# Altium PCB PCB1.PcbDoc
Units mil, origin at the board's own origin, x right, y up, seen from the top; angles counter-clockwise.
Board outline 2932 x 1521 mil, 2 copper layers (Top Layer, Bottom Layer), stack 60.4 mil thick; 49 components, 31 nets, 178 pads, 59 vias.
Unrouted connection lines stored in the file: 1.
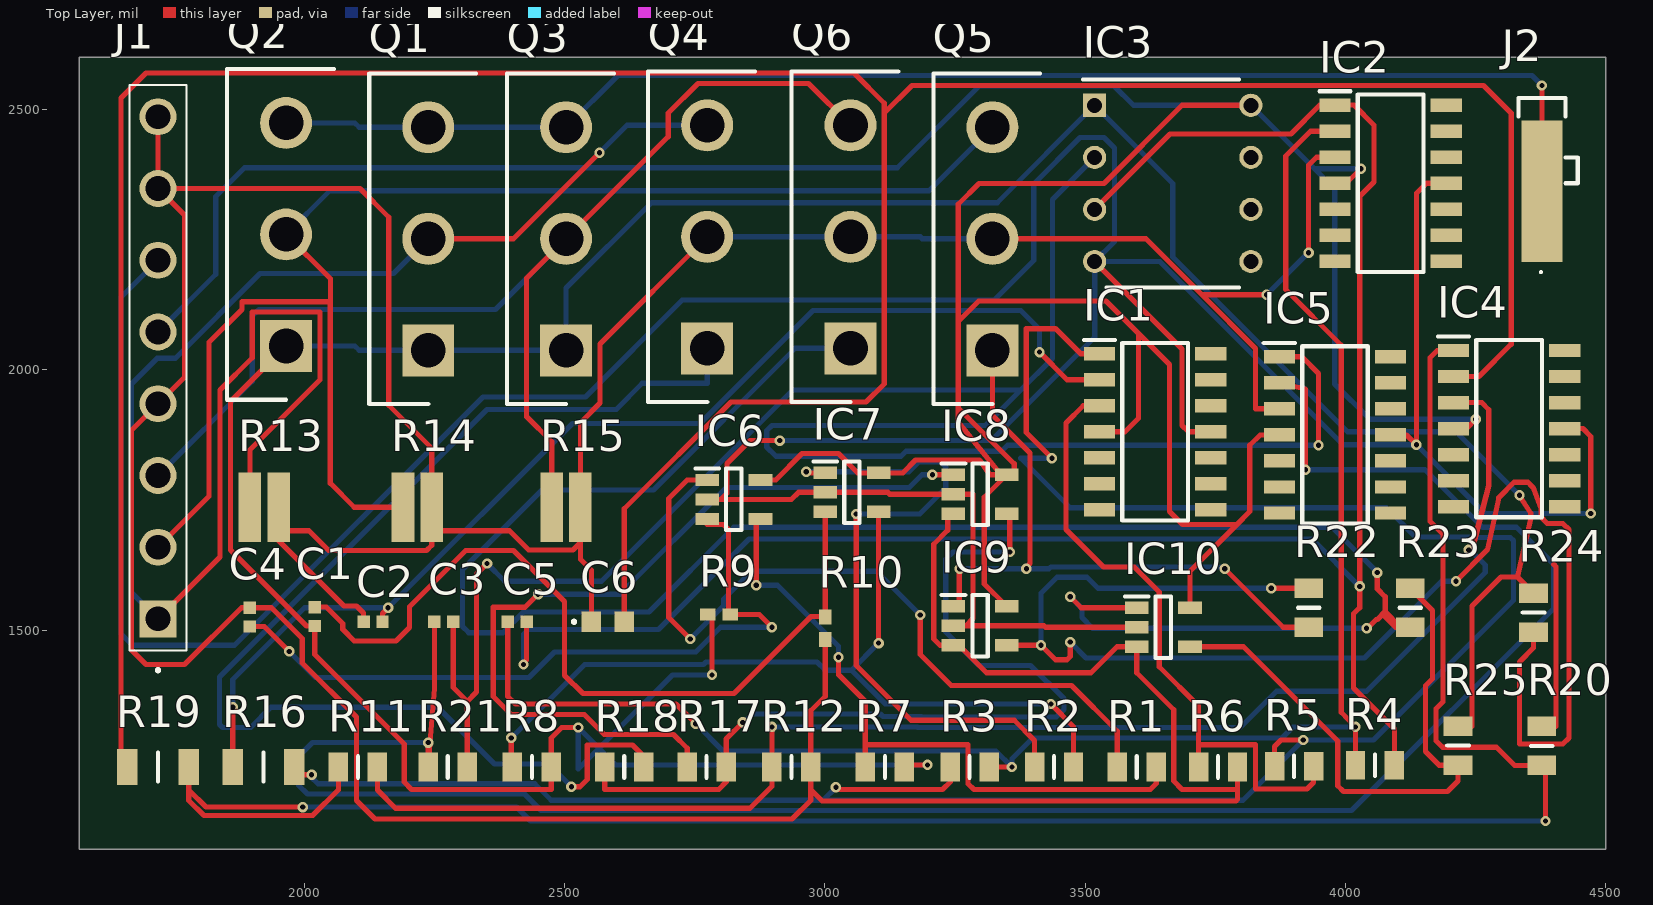
[diagram p0: Top Layer view]
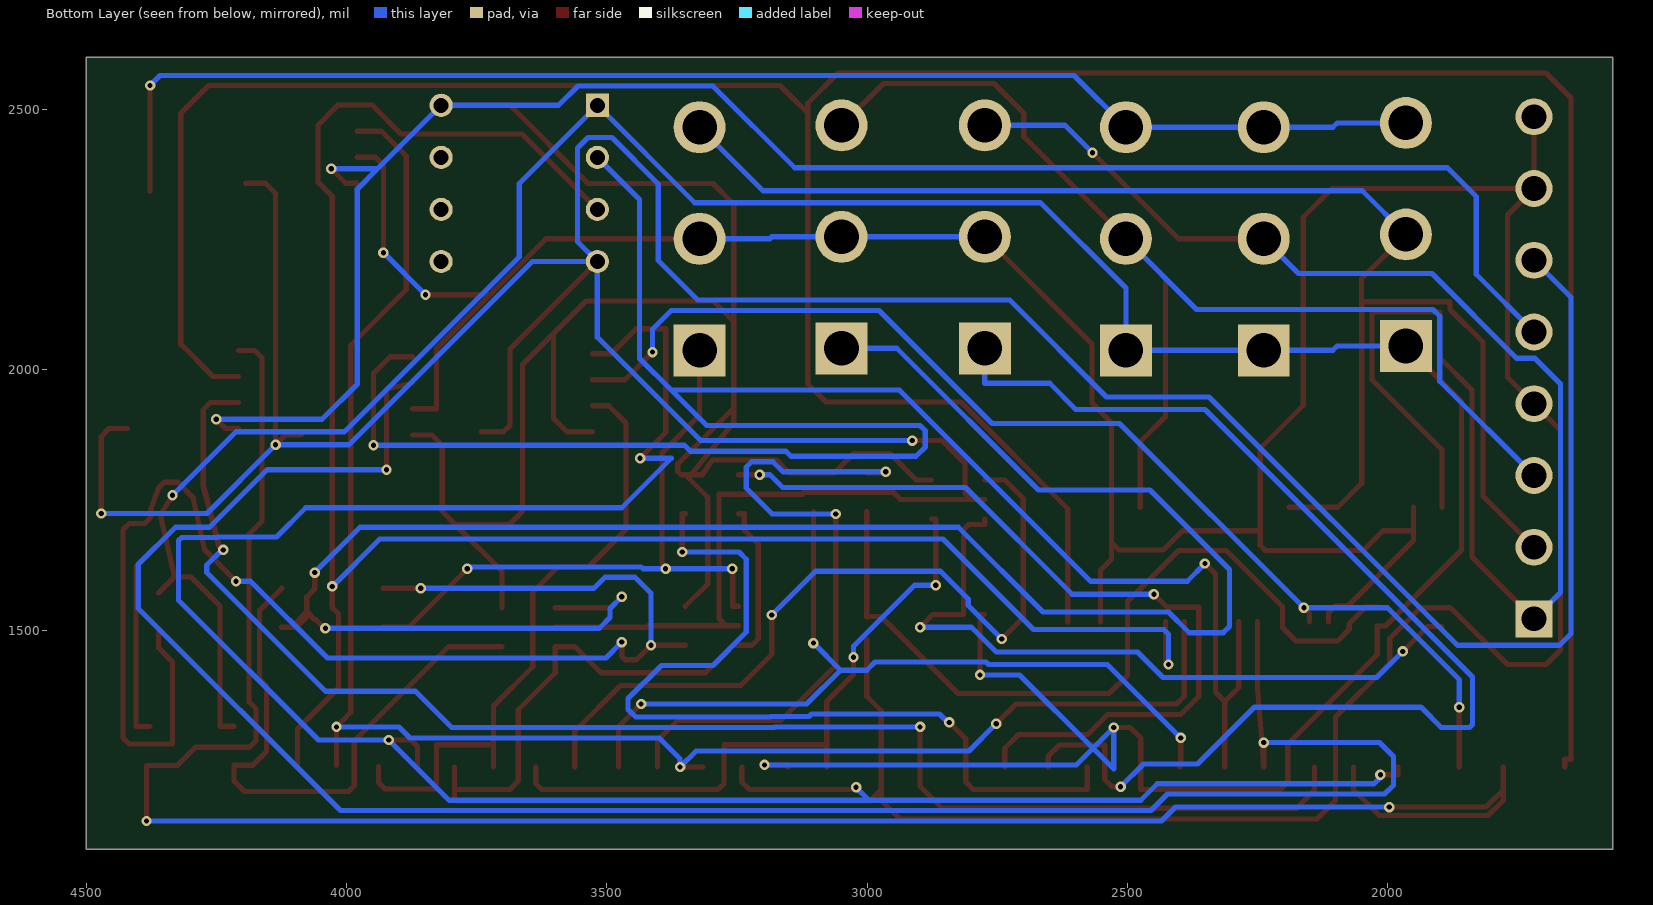
[diagram p1: Bottom Layer view, seen from below]
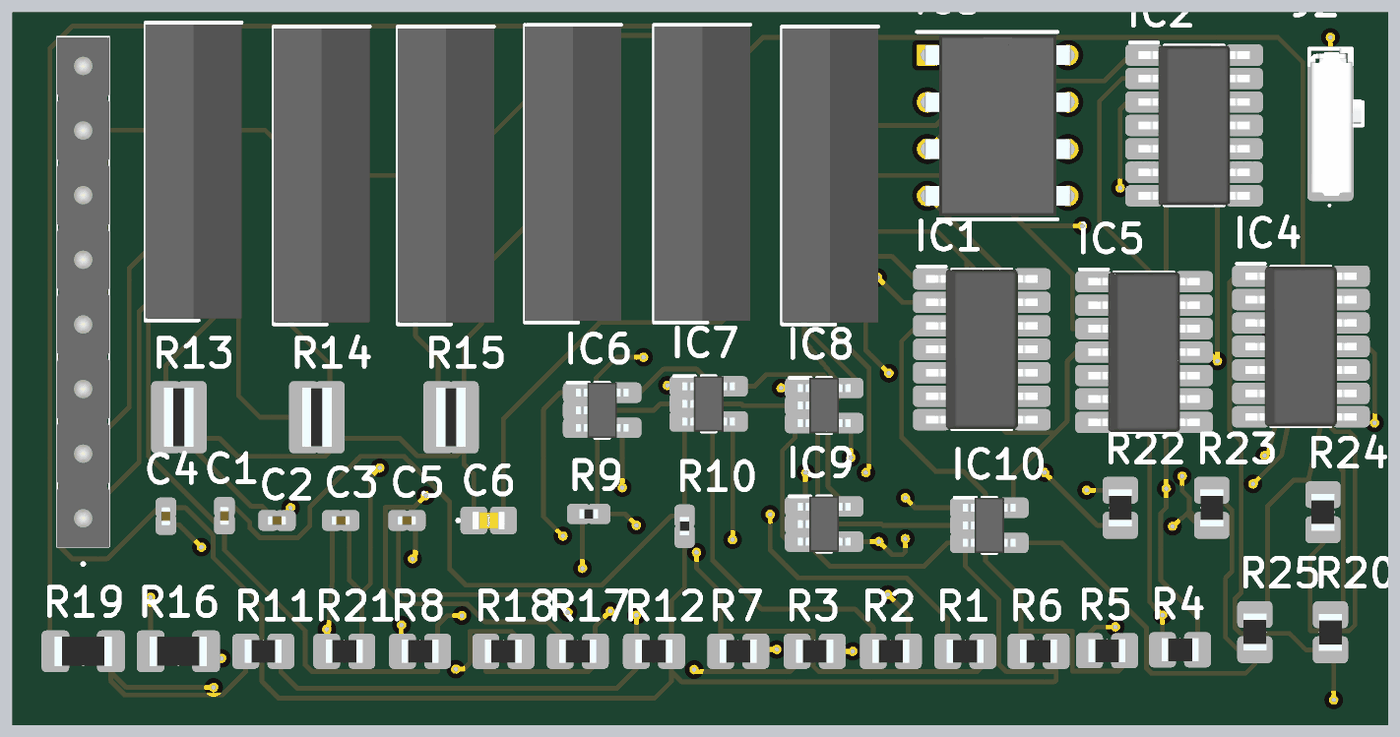
[diagram p2: 3D render of the assembled board from above, using the file's embedded part models]

## Layer stack, top to bottom
Top Solder: solder mask 0.5, Solder Resist, Dk 3.3
Top Layer: signal copper 0.7
Dielectric1: core 59, FR-4, Dk 4.3
Bottom Layer: signal copper 0.7
Bottom Solder: solder mask 0.5, Solder Resist, Dk 3.3

## Board outline
1568,1079 4500,1079 4500,2600 1568,2600

## Design rules (kind name [scope] priority, off if disabled: settings)
Clearance [All] p1: gap=10 ignorepadtopadclearanceinfootprint=FALSE
DiffPairsRouting [All] p1: maxlimit=10 minlimit=10 mostfreqgap=10 toplayer_minwidth=10 toplayer_maxwidth=10 toplayer_prefwidth=10 bottomlayer_minwidth=10 bottomlayer_maxwidth=10 bottomlayer_prefwidth=10 maxuncoupledlength=500
HoleSize [All] p1: absolutevalues=TRUE maxlimit=300 minlimit=10 maxpercent=80.000 minpercent=20.000
MinimumAnnularRing [All] p1: minimumring=10
PasteMaskExpansion [All] p1: expansion=10
PlaneClearance [All] p1: clearance=15
PlaneConnect [All] p1: pad.planeconnectstyle=Relief pad.reliefexpansion=20 pad.reliefentries=4 pad.reliefconductorwidth=10 pad.reliefairgap=10 via.planeconnectstyle=Direct via.reliefexpansion=20 via.reliefentries=4 via.reliefconductorwidth=10 via.reliefairgap=10
PolygonConnect [All] p1: thpad.connectstyle=Relief thpad.reliefconductorwidth=10 thpad.reliefentries=4 thpad.polygonreliefangle="90 Angle" thpad.airgapwidth=10 smdpad.connectstyle=Relief smdpad.reliefconductorwidth=10 smdpad.reliefentries=4 smdpad.polygonreliefangle="90 Angle" smdpad.airgapwidth=10 via.connectstyle=Direct via.reliefconductorwidth=10 via.reliefentries=4 via.polygonreliefangle="90 Angle" via.airgapwidth=10
RoutingVias [All] p1: holewidth=10 width=20 viastyle="Through Hole" minholewidth=10 minwidth=20 maxholewidth=10 maxwidth=20
SMDNeckDown [All] p1: percent=100.000
SilkToSolderMaskClearance SilkscreenOverComponentPads [IsPad] p1: minsilkscreentomaskgap=10 clearancetoexposedcopper=TRUE
SolderMaskExpansion [All] p1: expansion=10 istentingtop=FALSE
Width [All] p1: maxlimit=10 minlimit=10 preferedwidth=10
24 further rules are at their usual default settings.

## Components (designator, comment, footprint, x,y, rotation, side; value= is the part's Value field where it differs from the comment)
C1 "1uF" CAPC1005X55N 2020,1526 r90 top
C2 "0.1uF" CAPC1005X55N 2132.01,1516.02 r0 top
C3 "0.1uF" CAPC1005X55N 2267.88,1516.02 r0 top
C4 "1uF" CAPC1005X55N 1895.42,1525 r90 top
C5 "1uF" CAPC1005X55N 2408.87,1516.02 r0 top
C6 "0.01uF" C0603 2582.99,1516.02 r0 top
IC1 "LM324AD" SOIC127P600X175-14N 3634,1880.99 r0 top
IC2 "LM324AD" SOIC127P600X175-14N 4086.43,2358.35 r0 top
IC3 "LM393N" DIP762W53P254L980H533Q8N 3668,2358 r0 top
IC4 "LM324AD" SOIC127P600X175-14N 4314,1887 r0 top
IC5 "LM324AD" SOIC127P600X175-14N 3979.65,1874.99 r0 top
IC6 "TLV271CW5-7" SOT95P285X130-5N 2825,1751 r0 top
IC7 "TLV271CW5-7" SOT95P285X130-5N 3051.82,1764.6 r0 top
IC8 "TLV271CW5-7" SOT95P285X130-5N 3298,1761 r0 top
IC9 "TLV271CW5-7" SOT95P285X130-5N 3297.98,1508.28 r0 top
IC10 "TLV271CW5-7" SOT95P285X130-5N 3649.97,1505.6 r0 top
J1 "1945151" 1945151 1719,1521.43 r90 top
J2 "2065-100_998-403" 2065100998403 4388.81,2353.83 r90 top
Q1 "S1" TO544P521X1592X2557-3P 2238,2037.48 r90 top
Q2 "S3" TO544P521X1592X2557-3P 1965,2045.83 r90 top
Q3 "S5" TO544P521X1592X2557-3P 2502.87,2037.48 r90 top
Q4 "S2" TO544P521X1592X2557-3P 2773.82,2041.22 r90 top
Q5 "S4" TO544P521X1592X2557-3P 3321.6,2037.48 r90 top
Q6 "S6" TO544P521X1592X2557-3P 3049.04,2041.22 r90 top
R1 "10k" RESC2012X60N 3598.79,1237 r0 top
R2 "10k" RESC2012X60N 3440,1237 r0 top
R3 "10k" RESC2012X60N 3277.9,1237 r0 top
R4 "100k" RESC2012X60N 4056.43,1240.2 r0 top
R5 "10k" RESC2012X60N 3901,1238.23 r0 top
R6 "10k" RESC2012X60N 3755,1237 r0 top
R7 "10k" RESC2012X60N 3114.98,1237 r0 top
R8 "10k" RESC2012X60N 2436.93,1237 r0 top
R9 "5.6k" RESC1005X40N 2796.46,1529.94 r0 top
R10 "5.6k" RESC1005X40N 3000.64,1503.63 r90 top
R11 "10k" RESC2012X60N 2102.87,1237 r0 top
R12 "10k" RESC2012X60N 2935.4,1237 r0 top
R13 "300" RESC1632X65N 1922.98,1736 r0 top
R14 "300" RESC1632X65N 2217.05,1736 r0 top
R15 "300" RESC1632X65N 2502.81,1736 r0 top
R16 "90k" RESC3116X65N 1921.65,1237 r0 top
R17 "10k" RESC2012X60N 2772.83,1237 r0 top
R18 "10k" RESC2012X60N 2614.49,1237 r0 top
R19 "90k" RESC3116X65N 1719,1237 r0 top
R20 "10k" RESC2012X60N 4377,1277.6 r90 top
R21 "10k" RESC2012X60N 2275.4,1237 r0 top
R22 "10k" RESC2012X60N 3929.14,1543 r90 top
R23 "10k" RESC2012X60N 4124,1543 r90 top
R24 "10k" RESC2012X60N 4361,1533.6 r90 top
R25 "10k" RESC2012X60N 4216,1278 r90 top

## Footprints (in the part's own frame and the unit in brackets; to place one, negate y for a bottom-side part, rotate by r counter-clockwise, add the part's x,y. Pads: shape width x height; smd on the part's side, far side on the other; paste and mask are expansions set on the pad)
1945151 [mm]
  rect 1.8x1.8 hole 1.2: 1(0,0)
  round 1.8 hole 1.2: 2(3.5,0) 3(7,0) 4(10.5,0) 5(14,0) 6(17.5,0) 7(21,0) 8(24.5,0)
  silkscreen extent -2.55,-1.4 26.05,1.4, body extent -1.57,-1.4 26.03,1.4, height 9.38
2065100998403 [mm]
  rect 6.9x2 smd: 1(-0.275,0.3)
  silkscreen extent -4.27,-1.45 4.27,1.45, body extent -3.71,-1.37 4.29,1.38, height 2.7
C0603 [mm]
  rect 0.95x1 smd: 1(-0.8,0) 2(0.8,0)
  silkscreen extent -1.7,-0.05 -1.6,0.05, body extent -0.87,-0.48 0.88,0.47, height 0.87
CAPC1005X55N [mm]
  rect 0.6x0.62 smd: 1(-0.46,0) 2(0.46,0)
  body extent -0.5,-0.25 0.5,0.25, height 0.55
DIP762W53P254L980H533Q8N [mm]
  rect 1.13x1.13 hole 0.73: 1(-3.81,3.81)
  round 1.13 hole 0.73: 2(-3.81,1.27) 3(-3.81,-1.27) 4(-3.81,-3.81) 5(3.81,-3.81) 6(3.81,-1.27) 7(3.81,1.27) 8(3.81,3.81)
  silkscreen extent -4.38,-5.07 3.24,5.08, body extent -3.94,-4.9 3.94,4.9, height 5.33
RESC1005X40N [mm]
  rect 0.75x0.6 smd: 1(-0.55,0) 2(0.55,0)
  body extent -0.5,-0.25 0.5,0.25, height 0.4
RESC1632X65N [mm]
  rect 1.1x3.4 smd: 1(-0.7,0) 2(0.7,0)
  body extent -0.8,-1.6 0.8,1.6, height 0.65
RESC2012X60N [mm]
  rect 0.95x1.4 smd: 1(-0.95,0) 2(0.95,0)
  silkscreen extent 0,-0.52 0,0.53, body extent -1,-0.63 1,0.63, height 0.6
RESC3116X65N [mm]
  rect 1x1.75 smd: 1(-1.5,0) 2(1.5,0)
  silkscreen extent 0,-0.7 0,0.7, body extent -1.55,-0.8 1.55,0.8, height 0.65
SOIC127P600X175-14N [mm]
  rect 1.525x0.65 smd: 1(-2.712,3.81) 2(-2.712,2.54) 3(-2.712,1.27) 4(-2.712,0) 5(-2.712,-1.27) 6(-2.712,-2.54) 7(-2.712,-3.81) 8(2.712,-3.81) 9(2.712,-2.54) 10(2.712,-1.27) 11(2.712,0) 12(2.712,1.27) 13(2.712,2.54) 14(2.712,3.81)
  silkscreen extent -3.47,-4.33 1.6,4.49, body extent -3.01,-4.33 3.01,4.33, height 1.75
SOT95P285X130-5N [mm]
  rect 1.15x0.6 smd: 1(-1.3,0.95) 2(-1.3,0) 3(-1.3,-0.95) 4(1.3,-0.95) 5(1.3,0.95)
  silkscreen extent -1.87,-1.5 0.37,1.5, body extent -1.43,-1.5 1.43,1.5, height 1.3
TO544P521X1592X2557-3P [mm]
  rect 2.535x2.535 hole 1.69: 1(0,0)
  round 2.535 hole 1.69: 2(5.44,0) 3(10.88,0)
  silkscreen extent -2.63,-2.33 13.5,2.88, body extent -2.52,-2.33 13.4,2.88, height 25.23

## Part data
C1 C4 C5: library part JMK105BJ105KV-F, "Capacitor", Manufacturer_Name="TAIYO YUDEN", Mouser Part Number=963-JMK105BJ105KV-F, Datasheet Link=https://datasheet.datasheetarchive.com/originals/distributors/Datasheets-DGA20/25674.pdf, Height=0.55mm, Manufacturer_Part_Number=JMK105BJ105KV-F, Mouser Price/Stock=https://www.mouser.co.uk/ProductDetail/TAIYO-YUDEN/JMK105BJ105KV-F?qs=I6KAKw0tg2yJ6Hx%2Fbib9CA%3D%3D
C2 C3: library part CL05B104KP5NNNC, "Capacitor", Manufacturer_Name=SAMSUNG, Mouser Part Number=187-CL05B104KP5NNNC, Arrow Part Number=CL05B104KP5NNNC, Arrow Price/Stock=https://www.arrow.com/en/products/cl05b104kp5nnnc/samsung-electro-mechanics?region=nac, Datasheet Link=http://product.samsungsem.com/mlcc/CL05B104KP5NNN.do, Height=0.55mm, Manufacturer_Part_Number=CL05B104KP5NNNC, Mouser Price/Stock=https://www.mouser.co.uk/ProductDetail/Samsung-Electro-Mechanics/CL05B104KP5NNNC?qs=349EhDEZ59qDkVTTBSSSxw%3D%3D
C6: library part C0603C103J5REC7411, "Capacitor", Manufacturer_Name=KEMET, Mouser Part Number=80-C0603C103J5RE7411, Arrow Part Number=C0603C103J5REC7411, Arrow Price/Stock=https://www.arrow.com/en/products/c0603c103j5rec7411/kemet-corporation?region=nac, Datasheet Link=https://content.kemet.com/datasheets/KEM_C1090_X7R_ESD.pdf, Height=0.87mm, Manufacturer_Part_Number=C0603C103J5REC7411, Mouser Price/Stock=https://www.mouser.co.uk/ProductDetail/KEMET/C0603C103J5REC7411?qs=Mv7BduZupUg87Ut%2FUQ7ZXg%3D%3D
IC1 IC2 IC4 IC5: "Integrated Circuit", Manufacturer_Name="Texas Instruments", Mouser Part Number=595-LM324AD, Arrow Part Number=LM324AD, Arrow Price/Stock=https://www.arrow.com/en/products/lm324ad/texas-instruments?region=nac, Datasheet Link=http://www.ti.com/lit/ds/symlink/lm324a.pdf, Height=1.75mm, Manufacturer_Part_Number=LM324AD, Mouser Price/Stock=https://www.mouser.co.uk/ProductDetail/Texas-Instruments/LM324AD?qs=KaAwwOlwapt3jpyTZJatfQ%3D%3D
IC3: "Integrated Circuit", Manufacturer_Name=onsemi, Mouser Part Number=512-LM393N, Arrow Part Number=LM393N, Arrow Price/Stock=https://www.arrow.com/en/products/lm393n/on-semiconductor, Datasheet Link=http://www.onsemi.com/pub/Collateral/LM293A-D.pdf, Height=5.33mm, Manufacturer_Part_Number=LM393N, Mouser Price/Stock=https://www.mouser.co.uk/ProductDetail/onsemi-Fairchild/LM393N?qs=nkpohTZxueNdqcpnqJ9y4g%3D%3D
IC6 IC7 IC8 IC9 IC10: "Integrated Circuit", Manufacturer_Name="Diodes Incorporated", Mouser Part Number=621-TLV271CW5-7, Arrow Part Number=TLV271CW5-7, Arrow Price/Stock=https://www.arrow.com/en/products/tlv271cw5-7/diodes-incorporated?region=nac, Datasheet Link=https://datasheet.datasheetarchive.com/originals/distributors/Datasheets-DGA25/1624112.pdf, Height=1.3mm, Manufacturer_Part_Number=TLV271CW5-7, Mouser Price/Stock=https://www.mouser.co.uk/ProductDetail/Diodes-Incorporated/TLV271CW5-7?qs=dOK1vf2izjvah6baIk3yaA%3D%3D
J1: "Connector", Manufacturer_Name="Phoenix Contact", Mouser Part Number=651-1945151, Arrow Part Number=1945151, Arrow Price/Stock=https://www.arrow.com/en/products/1945151/phoenix-contact?region=nac, Datasheet Link=http://www.phoenixcontact.com/de/produkte/1945151/pdf, Height=9.2mm, Manufacturer_Part_Number=1945151, Mouser Price/Stock=https://www.mouser.co.uk/ProductDetail/Phoenix-Contact/1945151?qs=BYlwlsDsB%2FoyXM%2FBwWKgUA%3D%3D
J2: "Connector", Arrow Part Number=2065-100/998-403, Manufacturer_Name=Wago, Arrow Price/Stock=null?region=nac, Datasheet Link=https://www.wago.com/2065-100/998-403, Height=2.7mm, Manufacturer_Part_Number=2065-100/998-403
Q1 Q2 Q3 Q4 Q5 Q6: library part IHW30N160R5XKSA1, "Transistor IGBT", Manufacturer_Name=Infineon, Mouser Part Number=726-IHW30N160R5XKSA1, Arrow Part Number=IHW30N160R5XKSA1, Arrow Price/Stock=https://www.arrow.com/en/products/ihw30n160r5xksa1/infineon-technologies-ag?region=nac, Datasheet Link=https://www.infineon.com/dgdl/Infineon-IHW30N160R5-DS-v02_01-EN.pdf?fileId=5546d462677d0f460167ac8d680e1923, Height=5.21mm, Manufacturer_Part_Number=IHW30N160R5XKSA1, Mouser Price/Stock=https://www.mouser.co.uk/ProductDetail/Infineon-Technologies/IHW30N160R5XKSA1?qs=l7cgNqFNU1iDDdZRXMbfcQ%3D%3D
R1 R2 R3 R5 R6 R7 R8 R11 R12 R17 R18 R20 R21 R22 R23 R24 R25: library part RC0805FR-0710KL, "Resistor", Manufacturer_Name=YAGEO, Mouser Part Number=603-RC0805FR-0710KL, Arrow Part Number=RC0805FR-0710KL, Arrow Price/Stock=https://www.arrow.com/en/products/rc0805fr-0710kl/yageo?region=nac, Datasheet Link=https://www.yageo.com/upload/media/product/productsearch/datasheet/rchip/PYu-RC_Group_51_RoHS_L_11.pdf, Height=0.6mm, Manufacturer_Part_Number=RC0805FR-0710KL, Mouser Price/Stock=https://www.mouser.co.uk/ProductDetail/YAGEO/RC0805FR-0710KL?qs=7bY8808IzHq6vrU3BeiiYw%3D%3D
R4: library part RC0805FR-07100KL, "Resistor", Manufacturer_Name=KEMET, Mouser Part Number=603-RC0805FR-07100KL, Arrow Part Number=RC0805FR-07100KL, Arrow Price/Stock=https://www.arrow.com/en/products/rc0805fr-07100kl/yageo?region=nac, Datasheet Link=http://www.yageo.com/documents/recent/PYu-RC_Group_51_RoHS_L_10.pdf, Height=0.6mm, Manufacturer_Part_Number=RC0805FR-07100KL, Mouser Price/Stock=https://www.mouser.co.uk/ProductDetail/YAGEO/RC0805FR-07100KL?qs=8Y8p%252BasKcI7rEWn6FcVdAA%3D%3D
R9 R10: library part RC0402FR-075K6L, "Resistor", Manufacturer_Name=KEMET, Mouser Part Number=603-RC0402FR-075K6L, Arrow Part Number=RC0402FR-075K6L, Arrow Price/Stock=https://www.arrow.com/en/products/rc0402fr-075k6l/yageo?region=nac, Datasheet Link=http://www.yageo.com/documents/recent/PYu-RC0402_51_RoHS_L_6_r.pdf, Height=0.4mm, Manufacturer_Part_Number=RC0402FR-075K6L, Mouser Price/Stock=https://www.mouser.co.uk/ProductDetail/YAGEO/RC0402FR-075K6L?qs=Is6ZsIPfHkZGbvQHE6fDOQ%3D%3D
R13 R14 R15: library part LTR18EZPJ301, "Resistor", Manufacturer_Name="ROHM Semiconductor", Mouser Part Number=755-LTR18EZPJ301, Datasheet Link=https://componentsearchengine.com/Datasheets/1/LTR18EZPJ301.pdf, Height=0.65mm, Manufacturer_Part_Number=LTR18EZPJ301, Mouser Price/Stock=https://www.mouser.co.uk/ProductDetail/ROHM-Semiconductor/LTR18EZPJ301?qs=DyUWGjl%252BcVuuqATaEQmgHQ%3D%3D
R16 R19: library part RT1206DRE0790KL, "Resistor", Manufacturer_Name=KEMET, Mouser Part Number=603-RT1206DRE0790KL, Datasheet Link=https://www.yageo.com/en/ProductSearch/PartNumberSearch?part_number=RT1206DRE0790KL, Height=0.65mm, Manufacturer_Part_Number=RT1206DRE0790KL, Mouser Price/Stock=https://www.mouser.co.uk/ProductDetail/Yageo/RT1206DRE0790KL?qs=NgbZBzc1CyEoLHe57MF17w%3D%3D

## Via types
v1: diameter 20, hole 10, Top Layer to Bottom Layer, 59 vias

## Nets (pads, with @x,y where several pads share a name; then routed paths per layer and width w, separated by ;. In a path a pad name is that pad's centre, name@x,y a point inside that pad or via, vN(x,y) a via of type N, cw(c..) or ccw(c..) an arc to the next point about the centre after c; other vN are vias at no path point)
1: C1.1 IC3.1 Q1.1 Q2.1 Q3.1 R7.2 R8.2 R9.1 R24.2 R25.2 | length 6370.9
  Top Layer w10: Q2.1 1858,1938.83 1858,1654 2004.11,1507.89 C1.1 2020,1453 2192,1281 2192,1208 2206,1194 2474.33,1194 R8.2 2474.33,1293 2494.33,1313 v1(2526,1313) ; R9.1 2783,1529.94 v1(2783,1414) ; R7.2 3152.39,1241 v1(3197,1241) ; R25.2 4243,1315.4 4243,1546.54 4298.45,1601.99 4330,1601.99 ; v1(4334,1759) 4354.21,1726.96 4355.75,1724.52 4355.75,1715.72 4330,1601.99 ; R24.2 4330,1601.99
  Bottom Layer w10: Q2.1 2097,2045.83 2105.35,2037.48 Q1.1 Q3.1 2502.87,2156.87 2667,2321 3331,2321 IC3.1 3668,2358 3668,2216.6 4003.6,1881 4212,1881 v1(4334,1759) ; v1(2783,1414) 2707,1414 2566,1273 ; v1(3197,1241) 2598,1241 2566,1273 ; 2566,1273 2526,1233 v1(2526,1313) 2566,1273
2: Q4.1 R18.2 | length 2327.9
  Top Layer w10: v1(2513,1199) 2529.38,1199 2543.38,1213 2543.38,1279.56 2630.33,1279.56 2651.89,1258 R18.2
  Bottom Layer w10: v1(2513,1199) 2469,1243 2365,1243 2256,1352 1936,1352 1897,1313 1843,1313 1837,1319 1837,1410 2351,1924 2599,1924 2649,1974 2773.82,1974 Q4.1
4: IC9.1 Q5.1 R22.1 | length 1255.9
  Top Layer w10: IC9.1 3258,1545.69 3258,1617 v1(3259,1618) ; Q5.1 3321.6,1912.61 3394.06,1840.15 3394.06,1627.76 3387,1620.71 v1(3387,1618) ; v1(3768,1618) 3880.4,1505.6 R22.1
  Bottom Layer w10: v1(3259,1618) 3430.44,1618 3433.91,1621.47 3761.83,1621.47 3765.29,1618 v1(3768,1618)
6: IC10.1 Q6.1 R23.1 | length 3892
  Top Layer w10: v1(3471,1564.14) 3471.14,1564.14 3492.28,1543 IC10.1 ; v1(4040.43,1503.63) 4041.9,1503.63 4058.84,1520.57 4060.97,1520.57 4076,1535.6 ; v1(4060.97,1610.42) 4060.97,1579.17 4076,1564.14 4076,1535.6 ; R23.1 R23.1@4106,1505.6 ; 4076,1535.6 R23.1@4106,1505.6 ; 4076,1535.6 4076,1525.6 4096,1505.6 R23.1@4106,1505.6
  Bottom Layer w10: Q6.1 2942.8,2041.22 2670.58,1769 2456.64,1769 2304,1616.36 2304,1507 2316,1495 2381,1495 2421,1535 2662,1535 2824.73,1697.73 3973.67,1697.73 v1(4060.97,1610.42) ; v1(3471,1564.14) 3493.71,1541.43 3493.71,1524.43 3514.51,1503.63 v1(4040.43,1503.63)
-VCC: IC1.11 IC2.11 IC3.4 IC4.11 IC5.11 IC6.2 IC7.2 IC8.2 IC9.2 IC10.2 J1.6 | length 7959.1
  Top Layer w10: IC6.2 2800,1751 ; v1(2913,1864) 2856,1864 2812,1820 2812,1763 2800,1751 ; IC9.2 3270.28,1508.28 ; IC3.4 3686.01,2039.99 3686.01,1893 3698.02,1880.99 IC1.11 ; IC10.2 3423.69,1505.6 3421,1508.28 3270.28,1508.28 ; IC5.11 4117.01,1874.99 v1(4136,1856) 4136,2339 4155.35,2358.35 IC2.11 ; IC4.11 4456,1887 4471,1872 v1(4471,1724) ; 2800,1751 2935.4,1751 2949,1764.6 IC7.2 3121,1764.6 3124.6,1761 IC8.2 3284.46,1761 3284.46,1522.46 3270.28,1508.28
  Bottom Layer w10: J1.6 1648,2139.41 1648,1493 1670,1471 1866,1471 2343,1948 2540,1948 2726,2134 3325,2134 3401,2210 3401,2357 3490,2446 3536,2446 3556,2426 3556,2246 IC3.4 ; v1(2913,1864) 3319.35,1864 3518,2062.65 IC3.4 ; v1(4471,1724) 4268,1724 v1(4136,1856) 3995,1856 3643,2208 IC3.4
GND: C2.1 C4.2 C6.1 IC2.3 IC5.3 IC8.3 IC9.3 IC10.3 J1.4 J1.7 J1.8 Q4.2 Q5.2 Q6.2 R6.2 R10.1 R12.2 R13.2 R14.2 R15.2 | length 9751.9
  Top Layer w10: J1.8 J1.7 ; R13.2 R13.2@1950.54,1691 ; C2.1 2113.9,1533 2100.36,1546.54 2076,1546.54 1950.54,1672 R13.2@1950.54,1691 ; C6.1 2551.5,1615 2530.37,1636.13 2530.37,1668.37 ; Q4.2 2568,2049.57 2568,1936 2530.37,1898.37 R15.2 2530.37,1668.37 ; R10.1 3000.64,1372.83 2972.8,1345 R12.2 2972.8,1194 ; IC8.3 3236,1723.6 3236,1692 3209,1665 3209,1483 3221.12,1470.88 3257.62,1470.88 3310.3,1418.2 3511.15,1418.2 3561.15,1468.2 IC10.3 3598.79,1418.21 3670,1347 3670,1210 3686,1194 3792.4,1194 ; Q5.2 3616.35,2251.65 3724,2144 ; R6.2 3792.4,1194 ; v1(3848,2144) 3724,2144 ; IC5.3 3827,1924.99 3827,2041 3724,2144 ; v1(3929,2225) 3929,2393 3944.35,2408.35 IC2.3 ; J1.7 2106.79,2348.21 2162,2293 2162,1932 2244.61,1849.39 R14.2 R14.2@2244.61,1691 ; J1.7 1770,2297.21 1770,1985.82 J1.4 1668,1883.82 1668,1462 1696,1434 1770,1434 1879.11,1543.11 C4.2 1936.89,1543.11 1996,1484 1996,1437 2100,1333 2100,1173 2136,1137 2936.8,1137 2972.8,1173 2972.8,1194 ; R13.2@1950.54,1691 2009,1691 2047,1653 2234.61,1653 2244.61,1663 R14.2@2244.61,1691 ; R14.2@2244.61,1691 2394,1691 2431,1654 2516,1654 2530.37,1668.37 ; 2972.8,1194 2994.8,1172 3789.4,1172 3792.4,1175 3792.4,1194
  Bottom Layer w10: Q4.2 Q6.2 3183,2255.39 3186.74,2251.65 Q5.2 ; v1(3848,2144) v1(3929,2225)
I1: J2.1 Q1.3 Q2.3 Q3.3 | length 2667.6
  Top Layer w10: J2.1 v1(4377,2546)
  Bottom Layer w10: Q2.3 2097,2474.17 2105.35,2465.83 Q1.3 Q3.3 2602.29,2565.25 4357.75,2565.25 v1(4377,2546)
NetC1_2: C1.2 IC7.3 R10.2 | length 1569.9
  Top Layer w10: C1.2 2042,1544.11 2074,1512.11 2074,1501 2096,1479 2176,1479 2202,1505 2202,1545 2310,1653 2402,1653 2500,1555 2500,1413 2535,1378 2825,1378 2973,1526 R10.2@3000.64,1526 ; R10.2 R10.2@3000.64,1526 ; IC7.3 R10.2@3000.64,1526
NetC2_2: C2.2 IC1.2 R16.1 | length 2238.9
  Top Layer w10: R16.1 v1(1862.59,1352) ; C2.2 2150.12,1532.12 v1(2161,1543) ; v1(3412,2034) 3465.01,1980.99 IC1.2
  Bottom Layer w10: v1(1862.59,1352) 1862.59,1405.34 2000.25,1543 v1(2161,1543) 2515,1897 2760,1897 2977,2114 3376,2114 3412,2078 v1(3412,2034)
NetC3_1: C3.1 IC5.2 R20.2 R21.1 | length 4416.2
  Top Layer w10: v1(2238,1284) R21.1 2241.65,1283.71 2249.77,1387.77 C3.1 ; IC5.2 3923,1963 v1(3923,1808) ; R20.2 4404,1315 4404,1621.85 4400,1625.85
  Bottom Layer w10: v1(2238,1284) 2016,1284 1989,1257 1989,1202 2006,1185 2422.63,1185 2454.33,1153.3 4011.3,1153.3 4400,1542 4400,1625.85 4328.12,1697.72 4262.71,1697.72 4152.43,1808 v1(3923,1808)
NetC3_2: C3.2 IC3.2 IC5.1 R21.2 | length 4121.7
  Top Layer w10: C3.2 2285.99,1389.81 2312.8,1363 ; R21.2 2312.8,1363 ; v1(2351,1628) 2330.94,1607.95 2330.94,1381.14 2312.8,1363 ; IC5.1 3916.01,2024.99 3948,1993 v1(3948,1855)
  Bottom Layer w10: v1(2351,1628) 2385,1594 2571,1594 2938,1961 3376,1961 ; IC3.2 3437,2327 3437,2022 3376,1961 ; v1(3948,1855) 3350.56,1855 3338.96,1843.4 3155.65,1843.4 3146.25,1834 2906,1834 2888,1852 2888,1883 2898,1893 3308,1893 3376,1961
NetC4_1: C4.1 IC6.3 R9.2 | length 1395.2
  Top Layer w10: C4.1 1923,1506.89 v1(1970.89,1459) ; IC6.3 2773.82,1703 2805,1703 2815,1693 2815,1529.94 2873.66,1529.94 v1(2898,1505.6)
  Bottom Layer w10: v1(1970.89,1459) 2020.89,1409 2431.35,1409 2480.35,1458 2751.69,1458 2799.29,1505.6 v1(2898,1505.6)
NetC5_1: C5.1 IC2.2 R3.2 R4.1 | length 3252.5
  Top Layer w10: C5.1 2390.76,1373 2405.76,1358 2714,1358 v1(2752,1320) ; R3.2 v1(3359,1237) ; IC2.2 3933,2458.35 3885,2410.35 3885,2154 3991.7,2047.3 3991.7,1342.3 v1(4019.02,1314) R4.1
  Bottom Layer w10: v1(2752,1320) 2804,1268 3328,1268 v1(3359,1237) 3359,1253 3399,1293 3878,1293 3899,1314 v1(4019.02,1314)
NetC5_2: C5.2 IC2.1 IC3.3 R4.2 | length 3775.9
  Top Layer w10: v1(2421,1434) 2421,1436.71 2426.98,1442.69 C5.2 ; IC3.3 3663,2453 3895,2453 3950.35,2508.35 IC2.1 4016,2508.35 4054.67,2469.68 4054.67,2360.52 4027,2332.85 v1(4027,1584) 4027,1543.07 4015.43,1531.5 4015.43,1388.57 4093.83,1310.17 R4.2
  Bottom Layer w10: v1(2421,1434) 2421,1492 2430.25,1501.25 2680.25,1501.25 2854,1675 3936,1675 v1(4027,1584)
NetC6_2: C6.2 IC4.2 R19.1 | length 5990.1
  Top Layer w10: R19.1 1659.95,1252 1648,1252 1648,2522 1696,2570 3056,2570 3114,2512 3114,2493 ; C6.2 2614.49,1733 2819.49,1938 3079,1938 3114,1973 3114,2493 ; IC4.2 4256,1987 4318,2049 4318,2493 4265,2546 3167,2546 3114,2493
NetIC1_1: IC1.1 R3.1 R5.1 R16.2 | length 4544.1
  Top Layer w10: R16.2 1980.7,1222 v1(2014,1222) ; v1(3021,1198) 3025,1194 3226,1194 3240.49,1208.49 R3.1 ; v1(3436,1830) 3386.5,1879.5 3386.5,2079 3442.89,2079 3490.9,2030.99 IC1.1 ; R5.1 3863.6,1276.6 3876,1289 v1(3918.56,1289)
  Bottom Layer w10: v1(2014,1222) 2014,1217 2026,1205 2442.63,1205 2474.33,1173.3 2996.3,1173.3 ; v1(3021,1198) 2996.3,1173.3 ; v1(3436,1830) 3376,1830 3471,1735 4078,1735 4133.99,1679.01 4247.01,1679.01 4248.29,1677.72 4316.36,1677.72 4322.22,1671.87 4322.22,1557.46 4053.76,1289 v1(3918.56,1289) 3802.86,1173.3 2996.3,1173.3
NetIC1_3: IC1.3 R5.2 R6.1 | length 1220.7
  Top Layer w10: IC1.3 3496,1930.99 3463,1897.99 3463,1693 3535,1621 3594,1621 3642,1573 3642,1429.6 3717.6,1354 3717.6,1280 ; R6.1 3717.6,1280 ; R5.2 3938.4,1207.4 3926,1195 3827,1195 3827,1280 3717.6,1280
NetIC4_1: IC4.1 R11.1 R19.2 R20.1 | length 4197.6
  Top Layer w10: R19.2 1778.06,1193 ; v1(1997,1160) 1811.06,1160 1778.06,1193 ; R11.1 2065.47,1193.47 2016,1144 1807.06,1144 1778.06,1173 1778.06,1193 ; IC4.1 4176,2037 4162,2023 4162,1709 4187,1684 4187,1362.56 4173.44,1349 4173.44,1287.56 4186,1275 4290,1275 4324.8,1240.2 R20.1 4384,1240.2 v1(4384,1133.3)
  Bottom Layer w10: v1(1997,1160) 2407.63,1160 2434.33,1133.3 v1(4384,1133.3)
NetIC4_3: IC4.3 R11.2 R12.1 | length 2850.1
  Top Layer w10: R11.2 2140.28,1193 2175.28,1158 2856,1158 2898,1200 R12.1 v1(2898,1314) ; IC4.3 4261.37,1937 4275,1923.37 4275,1780.13 4274.99,1777.14 4244.21,1659.63 4241.39,1656.8 v1(4236.65,1654.01)
  Bottom Layer w10: v1(2898,1314) 3177.08,1314 3178.08,1313 3797.56,1313 3867.25,1382.69 4040.43,1382.69 4268.16,1610.42 4268.16,1625.06 4239.21,1654.01 v1(4236.65,1654.01)
NetIC6_1: IC6.1 R1.1 | length 1497.2
  Top Layer w10: v1(2741.34,1483) 2700,1524.34 2700,1753 2735.4,1788.4 IC6.1 ; v1(3183,1529) 3183,1453 3242.5,1393.5 3473.5,1393.5 3561.39,1305.61 R1.1
  Bottom Layer w10: v1(2741.34,1483) 2805.46,1547.12 2805.46,1559.46 2859,1613 3099,1613 v1(3183,1529)
NetIC6_4: IC6.4 R1.2 R7.1 | length 1270.1
  Top Layer w10: v1(2868,1586) 2868,1713.6 IC6.4 ; v1(3026,1448) 3026,1414.44 3077.58,1362.86 3077.58,1280 ; R7.1 3077.58,1280 ; R1.2 3636.19,1205.38 3624.81,1194 3286,1194 3275,1205 3275,1280 3077.58,1280
  Bottom Layer w10: v1(2868,1586) 2909,1586 3026,1469 v1(3026,1448)
NetIC7_1: IC7.1 R2.1 | length 1294.8
  Top Layer w10: v1(2964,1804) 2966,1802 IC7.1 ; v1(3060,1723) 3060,1432 3165,1327 3363.6,1327 3402.6,1288 R2.1
  Bottom Layer w10: v1(2964,1804) 3161.6,1804 3181,1823.4 3221.6,1823.4 3232,1813 3232,1773 3182,1723 v1(3060,1723)
NetIC7_4: IC7.4 R2.2 R8.1 | length 1652.1
  Top Layer w10: v1(2397.48,1293) 2397.48,1239.05 R8.1 ; v1(3103,1475) IC7.4 ; v1(3433.91,1358) 3477.4,1314.5 R2.2
  Bottom Layer w10: v1(2397.48,1293) 2538.48,1434 2766.58,1434 2771.58,1439 2984.64,1439 3000.64,1423 3051,1423 ; v1(3103,1475) 3051,1423 ; v1(3433.91,1358) 3116,1358 3051,1423
NetIC8_1: IC8.1 R17.1 | length 1610.4
  Top Layer w10: v1(2449,1569) 2424,1544 2363,1544 2363,1372.48 2397.48,1338 2537.56,1338 2576,1299.56 2708.87,1299.56 2735.43,1273 R17.1 ; v1(3206.4,1798.4) IC8.1
  Bottom Layer w10: v1(2449,1569) 2606,1569 2811,1774 3162,1774 3186.4,1798.4 v1(3206.4,1798.4)
NetIC8_4: IC8.4 R17.2 R18.1 | length 1690.6
  Top Layer w10: R18.1 2577.09,1194 2796,1194 2810.24,1208.24 R17.2 2810.24,1291 v1(2842,1322.76) ; IC8.4 3355,1723.6 v1(3355,1650)
  Bottom Layer w10: v1(2842,1322.76) 2844.71,1322.76 2860.94,1339 3106.72,1339 3111.72,1334 3185.37,1334 3186.37,1333 3444.26,1333 3458.91,1347.64 3458.91,1368.35 3395.04,1432.22 3295.87,1432.22 3232,1496.09 3232,1636 3246,1650 v1(3355,1650)
NetIC9_4: IC9.4 R22.2 R24.1 | length 2733.6
  Top Layer w10: IC9.4 v1(3414.88,1470.88) 3442.57,1443.2 3465.14,1443.2 3471,1449.06 v1(3471,1477.06) ; v1(3857.4,1580.4) R22.2 ; v1(4212,1594) 4272.7,1654.7 4294.35,1754.7 4323.64,1783.99 4327.72,1784 4350.07,1784 4358.14,1775.93 4361.07,1773 4375.75,1731.94 4375.75,1717.99 4381.36,1710.86 4387.22,1705 4417,1705 4429,1693 4429,1293 4417,1281 4334,1281 4334,1439 4361,1466 R24.1
  Bottom Layer w10: v1(3414.88,1470.88) 3414.88,1570.7 3445.64,1601.47 3503.34,1601.47 3524.4,1580.4 v1(3857.4,1580.4) ; v1(3471,1477.06) 3501.51,1446.54 4036.54,1446.54 4184,1594 v1(4212,1594)
NetIC10_4: IC10.4 R23.2 R25.1 | length 1129.9
  Top Layer w10: IC10.4 3803.8,1468.2 3985,1287 3985,1201 3996,1190 4196,1190 4216,1210 R25.1 4179.4,1240.6 4153.44,1266.56 4153.44,1393 4167,1406.56 4167,1537.4 R23.2
O1: J1.1 Q1.2 Q4.3 R13.1 | length 3008.7
  Top Layer w10: J1.1 1838,1640.43 1838,1961 1900.1,2023.1 1900.1,2110.73 2029.9,2110.73 2029.9,1980.93 1895.42,1846.45 R13.1 ; Q1.2 2401.65,2251.65 v1(2567,2417)
  Bottom Layer w10: J1.1 1668,1572.43 1668,1973 1717,2022 1752,2022 1915,2185 2171.35,2185 Q1.2 ; v1(2567,2417) 2619.57,2469.57 Q4.3
O2: J1.2 Q2.2 Q5.3 R14.1 | length 3170.4
  Top Layer w10: J1.2 1817,1757.23 1817,2053 1880.1,2116.1 1880.1,2130.73 2049.9,2130.73 2049.9,1782.1 2050,1782 ; Q2.2 2050,2175 2050,1782 ; R14.1 2096,1736 2050,1782
  Bottom Layer w10: Q2.2 2049,2344 3199.77,2344 Q5.3
O3: J1.3 Q3.2 Q6.3 R15.1 | length 2342
  Top Layer w10: R15.1 2475.25,1861.75 2427,1910 2427,2175.78 Q3.2 2699,2447.78 2699,2493 2756,2550 2968.61,2550 Q6.3
  Bottom Layer w10: J1.3 1900,1978.02 1900,2103 1913,2116 2367.22,2116 Q3.2
VCC: IC1.4 IC2.4 IC3.8 IC4.4 IC5.4 IC6.5 IC7.5 IC8.5 IC9.5 IC10.5 J1.5 | length 7262
  Top Layer w10: IC6.5 2905.4,1788.4 2956,1839 3026,1839 3063,1802 IC7.5 3149.3,1802 3174,1826.7 3297,1826.7 3316.6,1798.4 IC8.5@3338,1798.4 ; IC9.5 3306.04,1588.8 3306.04,1755.26 IC8.5 ; IC1.4 3576,1880.99 3602,1906.99 3602,2070 ; IC10.5 3701.15,1613 3791.15,1703 ; IC3.8 3686,2508 3536,2358 3296,2358 3256,2318 3256,2093 ; IC5.4 3836,1874.99 3816,1854.99 3816,1727.85 3791.15,1703 ; IC2.4 4001.35,2358.35 v1(4029,2386) ; IC4.4 4232,1887 v1(4250,1905) ; 3256,1926.86 3363.5,1819.35 3363.5,1805.21 3356.69,1798.4 IC8.5 ; 3256,1926.86 3256,2093 ; 3256,1926.86 3256,1899 IC8.5@3338,1798.4 ; 3256,2093 3295.38,2132.38 3539.62,2132.38 3602,2070 ; IC8.5@3338,1798.4 IC8.5 ; 3602,2070 3662,2010 3662,1728 3687,1703 3791.15,1703
  Bottom Layer w10: J1.5 1830,2183.61 1830,2333 1885,2388 3139,2388 3296.25,2545.25 3555.25,2545.25 3592.49,2508 IC3.8 3940,2386 ; v1(4029,2386) 3940,2386 ; v1(4250,1905) 4047,1905 3979,1973 3979,2347 3940,2386
pads on no net: IC1.5 IC1.6 IC1.7 IC1.8 IC1.9 IC1.10 IC1.12 IC1.13 IC1.14 IC2.5 IC2.6 IC2.7 IC2.8 IC2.9 IC2.10 IC2.12 IC2.13 IC2.14 IC3.5 IC3.6 IC3.7 IC4.5 IC4.6 IC4.7 IC4.8 IC4.9 IC4.10 IC4.12 IC4.13 IC4.14 IC5.5 IC5.6 IC5.7 IC5.8 IC5.9 IC5.10 IC5.12 IC5.13 IC5.14